# Altium PCB PCB1.PcbDoc
Units mm, origin at the board's own origin, x right, y up, seen from the top; angles counter-clockwise.
Board outline 69.11 x 35.61 mm, 2 copper layers (Top Layer, Bottom Layer); 32 components, 26 nets, 136 pads, 14 vias.
Unrouted connection lines stored in the file: 1.
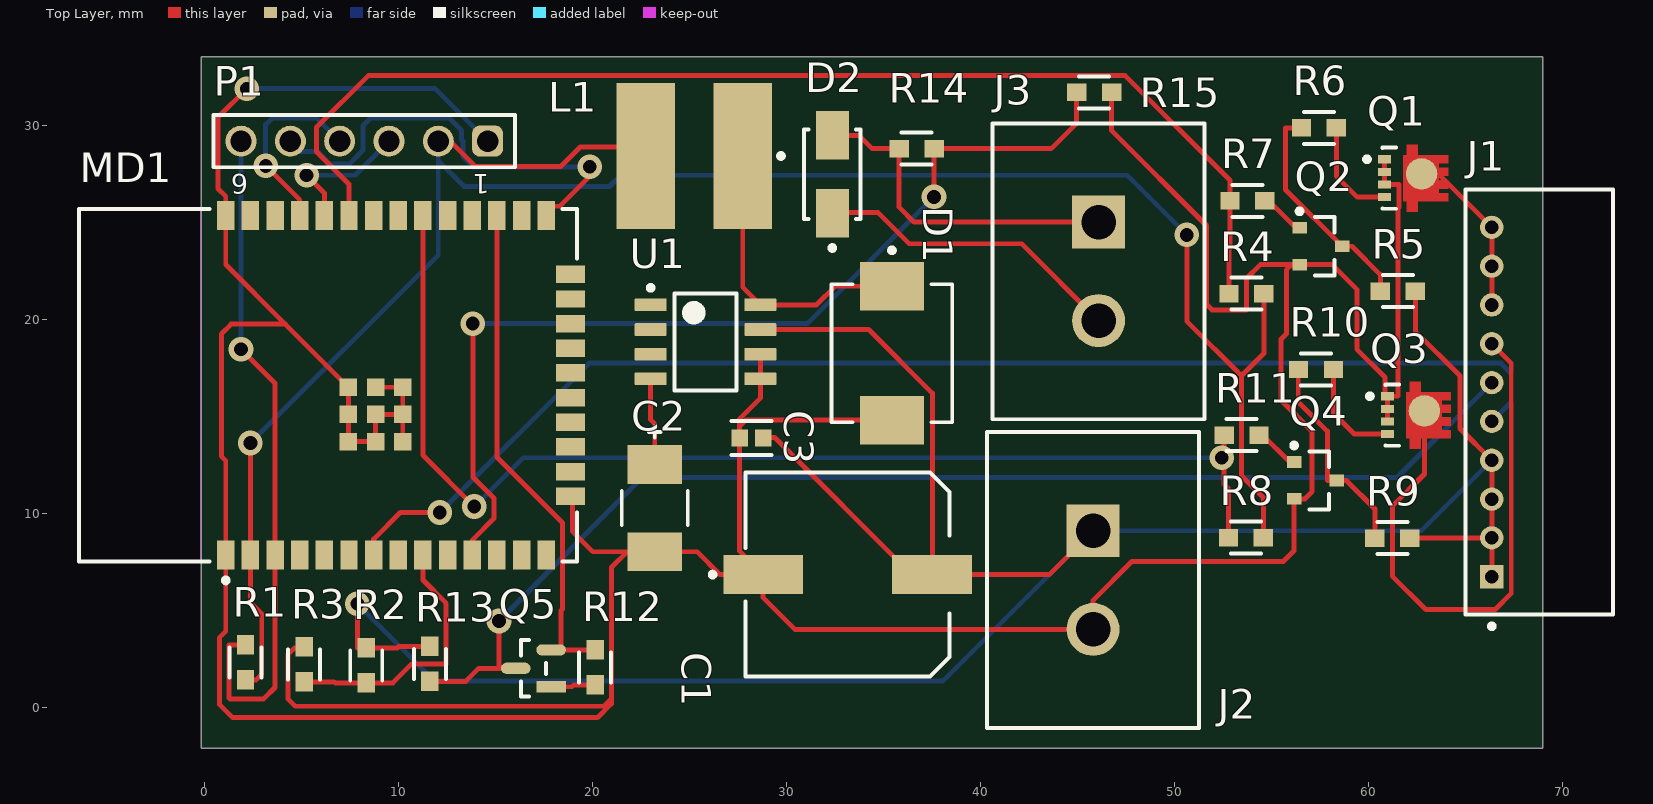
[diagram p0: Top Layer view]
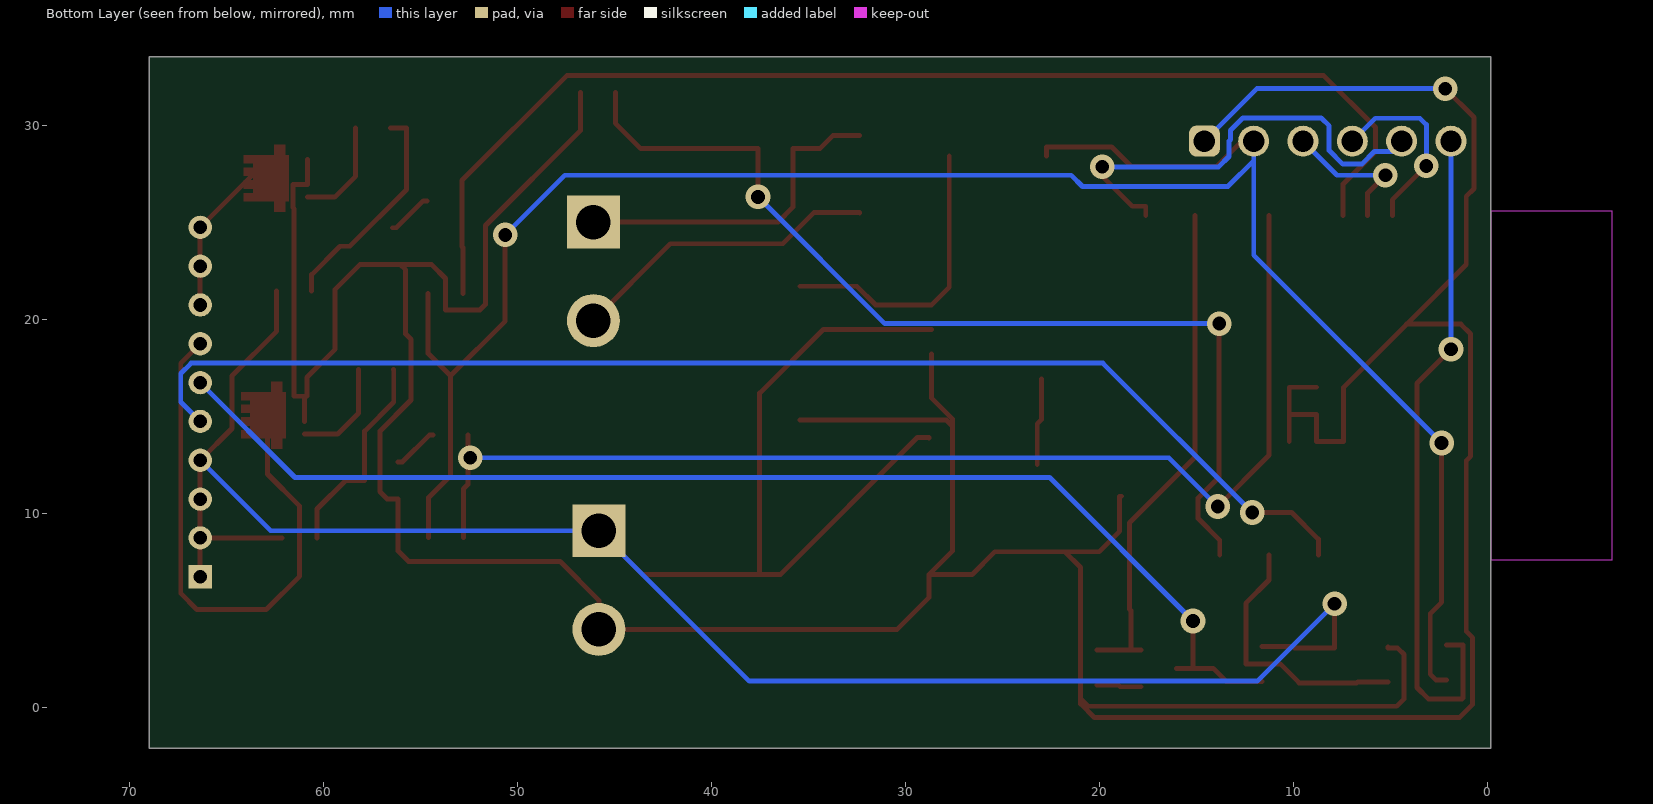
[diagram p1: Bottom Layer view, seen from below]
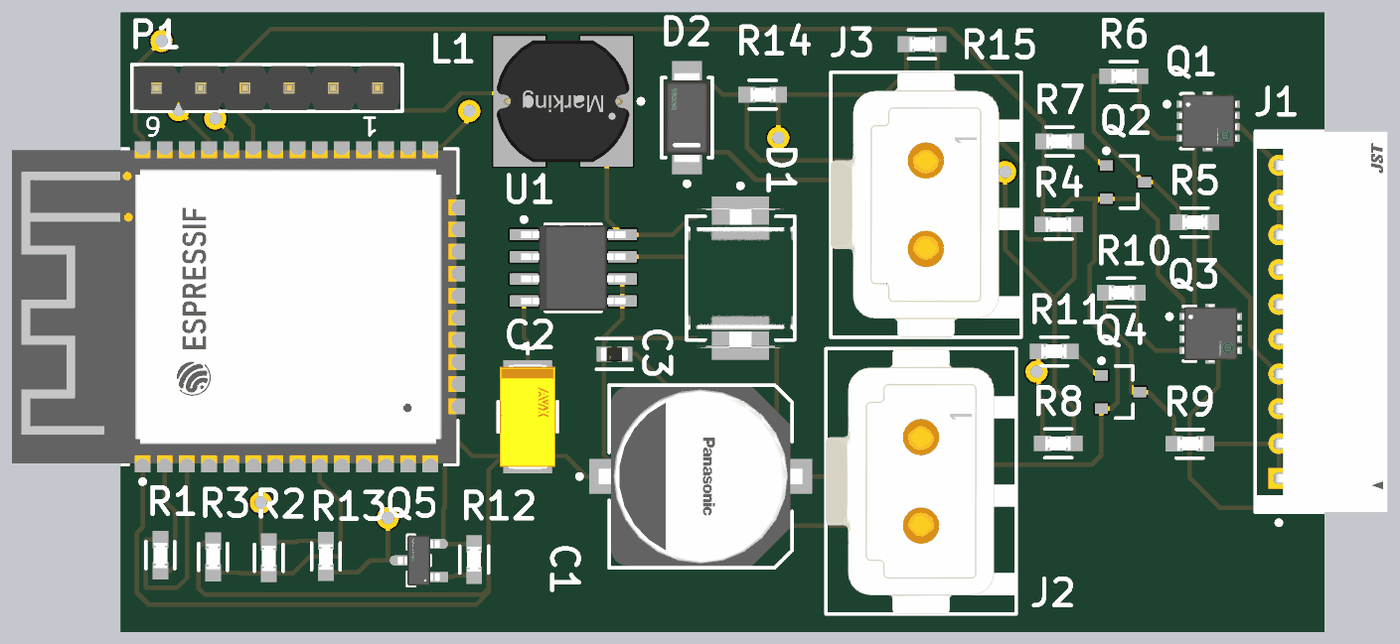
[diagram p2: 3D render of the assembled board from above, using the file's embedded part models]

## Layer stack, top to bottom
Top Solder: solder mask 0.0102, Solder Resist, Dk 3.5
Top Layer: signal copper 0.0356
Dielectric 1: dielectric 0.32, FR-4, Dk 4.8
Bottom Layer: signal copper 0.0356
Bottom Solder: solder mask 0.0102, Solder Resist, Dk 3.5

## Board outline
-0.152,-2.083 -0.152,33.528 68.961,33.528 68.961,-2.083

## Design rules (kind name [scope] priority, off if disabled: settings)
Clearance [All] p1: gap=0.254 ignorepadtopadclearanceinfootprint=FALSE
PolygonConnect [All] p1: connectstyle=Relief reliefconductorwidth=0.254 reliefentries=4 polygonreliefangle="90 Angle" airgapwidth=0.254
RoutingVias [All] p1: holewidth=0.711 width=1.27 viastyle="Through Hole" minholewidth=0.711 minwidth=1.27 maxholewidth=0.711 maxwidth=1.27
SolderMaskExpansion [All] p1: expansion=0.102 istentingtop=FALSE
Width [All] p1: maxlimit=0.254 minlimit=0.254 preferedwidth=0.254
30 further rules are at their usual default settings.

## Classes and differential pairs
component class CONNECTORS: D2 J1 J2 J3 P1 R14 R15
component class "COMM LEVEL SHIFTER": Q5 R12 R13
component class POWER: C1 C2 C3 D1 L1 Q2 Q3 Q4 Q5 R6 R7 R8 R9 R10 R11 R12 R13 U1
component class MCU: MD1 R1 R2 R3

## Components (designator, comment, footprint, x,y, rotation, side; value= is the part's Value field where it differs from the comment)
C1 "470uF/35V" FP-FKSG-MFG 33.145,6.86 r0 top
C2 "100uF/16V" FP-TAJC-MFG 23.216,10.287 r90 top
C3 "1uF" FP-0603-L_1_6_0_15-W_0_8-IPC_C 28.194,13.894 r180 top
D1 "SK33-TP" FP-SMC-MFG 35.433,18.263 r270 top
D2 "ES2DA-13-F" FP-SMA-MFG 32.36,27.483 r90 top value=25pF
J1 "S10B-PH-K-S(LF)(SN)" FP-S10B-PH-K-S_LF_SN-MFG 68.783,15.748 r270 top
J2 "350539-1" FP-350539-1-MFG 45.796,6.579 r90 top
J3 "350539-1" FP-350539-1-MFG 46.076,22.479 r90 top
L1 "220uH/510mA" WE-PD2_7850 25.248,28.423 r180 top
MD1 "ESP32-WROOM-32E(M113EH3200PH3Q0)" FP-ESP32-WROOM-32E_M113EH-MFG 6.376,16.61 r90 top
P1 "61300611121" 61300611121 8.255,29.185 r180 top
Q1 "G30N03D3" FP-511AB-MFG 62.281,27.28 r270 top
Q2 "SMBT3904" INF-SOT23_L 57.531,23.774 r0 top
Q3 "G30N03D3" FP-511AB-MFG 62.43,15.072 r270 top
Q4 "SMBT3904" INF-SOT23_L 57.252,11.709 r0 top
Q5 "BSS138" FP-318-08-IPC_B 16.967,2.032 r180 top
R1 "10k" FP-RP731J-MFG 2.134,2.337 r90 top value=10kΩ
R2 "91k" FP-RP731J-MFG 8.357,2.184 r90 top value=91kΩ
R3 "12k" FP-RP731J-MFG 5.156,2.235 r270 top value=12kΩ
R4 "1k" FP-RP731J-MFG 53.696,21.336 r0 top value=1kΩ
R5 "10k" FP-RP731J-MFG 61.493,21.463 r180 top value=10kΩ
R6 "1R" FP-RP731J-MFG 57.429,29.87 r180 top value=1Ω
R7 "1k" FP-RP731J-MFG 53.746,26.111 r0 top value=1kΩ
R8 "1k" FP-RP731J-MFG 53.67,8.763 r0 top value=1kΩ
R9 "10k" FP-RP731J-MFG 61.214,8.738 r180 top value=10kΩ
R10 "1R" FP-RP731J-MFG 57.277,17.424 r180 top value=1Ω
R11 "1k" FP-RP731J-MFG 53.442,14.046 r0 top value=1kΩ
R12 "10k" FP-RP731J-MFG 20.142,2.083 r270 top value=10kΩ
R13 "10k (N.C.)" FP-RP731J-MFG 11.633,2.261 r90 top value=10kΩ
R14 "91k" FP-RP731J-MFG 36.703,28.804 r180 top value=91kΩ
R15 "12k" FP-RP731J-MFG 45.847,31.699 r180 top value=12kΩ
U1 "LM2594M-3.3" D0008A_M 25.83,18.848 r0 top

## Footprints (in the part's own frame and the unit in brackets; to place one, negate y for a bottom-side part, rotate by r counter-clockwise, add the part's x,y. Pads: shape width x height; smd on the part's side, far side on the other; paste and mask are expansions set on the pad)
61300611121 [mm] "Pin Header, pitch 2.54 mm, THT, Vertical, single row, 6p"
  rrect50% 1.6x1.6 hole 1.1: 1(-6.35,0)
  round 1.6 hole 1.1: 2(-3.81,0) 3(-1.27,0) 4(1.27,0) 5(3.81,0) 6(6.35,0)
  silkscreen extent -7.77,-1.34 7.77,1.34, body extent -7.62,-1.27 7.62,1.27, height 8.57
D0008A_M [mm] "SOIC, 8-Leads, Body 5x4mm, Pitch 1.27mm, IPC Low Density"
  rrect15% 1.65x0.65 smd: 1(-2.825,1.905) 2(-2.825,0.635) 3(-2.825,-0.635) 4(-2.825,-1.905) 5(2.825,-1.905) 6(2.825,-0.635) 7(2.825,0.635) 8(2.825,1.905)
  silkscreen extent -2.95,-2.5 1.6,2.9, body extent -3,-2.45 3,2.45, height 1.63
FP-318-08-IPC_B [mm]
  rect 1.524x0.578 smd paste+0 mask+0: 1(-0.91,0.95)
  rrect100% 1.524x0.578 smd paste+0 mask+0: 2(-0.91,-0.95) 3(0.91,0)
  silkscreen extent -0.65,-1.45 0.65,1.45, body extent -1.92,-1.7 1.92,1.7, height 0.25
FP-511AB-MFG [mm]
  rect 0.42x0.66 smd paste+0 mask+0: 1(-0.975,-1.47) 2(-0.325,-1.47) 3(0.325,-1.47) 4(0.975,-1.47)
  round 1.623 smd paste+0 mask+0: 5-6-7-8(-0.221,0.434)
  Top Layer region: -1.73,-0.32 -1.185,-0.32 -1.185,-0.5 1.185,-0.5 1.185,-0.32 1.73,-0.32 1.73,0.25 1.185,0.25 1.185,1.8 0.765,1.8 0.765,1.33 0.535,1.33 0.535,1.8 0.115,1.8 0.115,1.33 -0.115,1.33 -0.115,1.8 -0.535,1.8 -0.535,1.33 -0.765,1.33 -0.765,1.8 -1.185,1.8 -1.185,0.25 -1.73,0.25 -1.73,-0.32
  silkscreen extent -1.58,-2.5 1.58,-0.87, body extent -1.83,-1.9 1.83,1.9, height 0.25
FP-0603-L_1_6_0_15-W_0_8-IPC_C [mm]
  rect 0.858x0.862 smd paste+0 mask+0: 1(-0.602,0) 2(0.602,0)
  silkscreen extent -1.03,-0.88 1.03,0.87, body extent -1.13,-0.58 1.13,0.58, height 0.25
FP-350539-1-MFG [mil]
  rect 107.4x107.4 hole 70 paste-99999 mask+0: 1(100,0)
  round 107.4 hole 70 paste-99999 mask+0: 2(-100,0)
  silkscreen extent -300,-215 300,215, body extent -304,-219 304,219, height 10
FP-ESP32-WROOM-32E_M113EH-MFG [mm]
  rect 1.5x0.9 smd paste+0 mask+0: 1(-8.75,5.26) 2(-8.75,3.99) 3(-8.75,2.72) 4(-8.75,1.45) 5(-8.75,0.18) 6(-8.75,-1.09) 7(-8.75,-2.36) 8(-8.75,-3.63) 9(-8.75,-4.9) 10(-8.75,-6.17) 11(-8.75,-7.44) 12(-8.75,-8.71) 13(-8.75,-9.98) 14(-8.75,-11.25) 25(8.75,-11.25) 26(8.75,-9.98) 27(8.75,-8.71) 28(8.75,-7.44) 29(8.75,-6.17) 30(8.75,-4.9) 31(8.75,-3.63) 32(8.75,-2.36) 33(8.75,-1.09) 34(8.75,0.18) 35(8.75,1.45) 36(8.75,2.72) 37(8.75,3.99) 38(8.75,5.26)
  rect 0.9x1.5 smd paste+0 mask+0: 15(-5.715,-12.5) 16(-4.445,-12.5) 17(-3.175,-12.5) 18(-1.905,-12.5) 19(-0.635,-12.5) 20(0.635,-12.5) 21(1.905,-12.5) 22(3.175,-12.5) 23(4.445,-12.5) 24(5.715,-12.5)
  rect 0.9x0.9 smd paste+0 mask+0: 39(-2.9,-2.46) 39(-2.9,-1.06) 39(-2.9,-3.86) 39(-1.5,-1.06) 39(-1.5,-3.86) 39(-1.5,-2.46) 39(-0.1,-1.06) 39(-0.1,-2.46) 39(-0.1,-3.86)
  Keep-Out Layer region: -9,6.559 9,6.559 9,12.75 -9,12.75
  silkscreen extent -10.17,-12.82 9.07,12.83, body extent -9.6,-13.35 9.6,12.93, height 0.25
FP-FKSG-MFG [mm]
  rect 4.1x2 smd paste+0 mask+0: 1(-4.35,0) 2(4.35,0)
  silkscreen extent -7.07,-5.25 5.25,5.25, body extent -6.65,-5.5 6.65,5.5, height 0.25
FP-RP731J-MFG [mm]
  rect 1x0.9 smd paste+0 mask+0: 1(-0.9,0) 2(0.9,0)
  silkscreen extent -0.78,-0.82 0.78,0.82, body extent -1.5,-0.55 1.5,0.55, height 0.25
FP-S10B-PH-K-S_LF_SN-MFG [mm]
  rect 1.2x1.2 hole 0.7 paste-2539.97 mask+0: 1(9,-2.45)
  round 1.2 hole 0.7 paste-2539.97 mask+0: 2(7,-2.45) 3(5,-2.45) 4(3,-2.45) 5(1,-2.45) 6(-1,-2.45) 7(-3,-2.45) 8(-5,-2.45) 9(-7,-2.45) 10(-9,-2.45)
  silkscreen extent -10.95,-3.8 11.67,3.8, body extent -11.05,-3.9 11.05,3.9, height 0.25
FP-SMA-MFG [mm]
  rect 2.5x1.7 smd paste+0 mask+0: 1(-2,0) 2(2,0)
  silkscreen extent -3.92,-1.46 2.3,1.46, body extent -3.35,-1.56 3.35,1.56, height 0.25
FP-SMC-MFG [mm]
  rect 2.5x3.3 smd paste+0 mask+0: 1(-3.45,0) 2(3.45,0)
  silkscreen extent -5.42,-3.11 3.55,3.11, body extent -4.8,-3.21 4.8,3.21, height 0.25
FP-TAJC-MFG [mm]
  rect 2x2.8 smd paste+0 mask+0: 1(-2.25,0) 2(2.25,0)
  silkscreen extent -0.87,-1.7 4.23,1.7, body extent -3.35,-1.8 3.35,1.8, height 0.25
INF-SOT23_L [mm] "SOT23, 3-Leads, Body 2.9x1.3 mm, Pitch 0.95 mm, IPC High Density"
  rect 0.75x0.6 smd: 1(-1.1,0.95) 2(-1.1,-0.95) 3(1.1,0)
  silkscreen extent -1.22,-1.5 0.7,1.92, body extent -0.7,-1.5 0.7,1.5, height 1.1
WE-PD2_7850 [mm] "SMD Power Inductor, 2-Leads, body 7.8x7mm"
  rect 3x7.5 smd: 1(-2.5,0) 2(2.5,0)
  silkscreen extent -4.59,-0.12 -4.34,0.12, body extent -3.81,-3.5 3.81,3.5, height 4.95

## Part data
C1: library part CMP-05427-000037-1, "CAP ALUM 470UF 20% 35V SMD", Capacitance=470uF, Case/Package=Radial, ESR (Equivalent Series Resistance)=80mR, LCSC Part #=C280413, Max Operating Temperature=105°C, Min Operating Temperature=-55°C, Package Quantity=500, Ripple Current=552.5mA, Ripple Current (AC)=850mA, Tolerance=20%, Voltage Rating=35V, Diameter=10mm, Height=10.2mm, Height - Seated (Max)=0.413inch, Life (Hours)=2000Hour, Mount="Surface Mount", packaging="Cut Tape", Polarity=Polar, RoHS Compliant=Yes, Voltage Rating (DC)=35V
C2: library part CMP-2100-03691-2, "100uF 16V  ±10% 1Ω 2312  SMD Tantalum Capacitor", Capacitance=100uF, Case Code (Metric)=6032, Case Code (Imperial)=2412, Case/Package=Molded, ESR (Equivalent Series Resistance)=1R, LCSC Part #=C122646, Leakage Current=16uA, Max Operating Temperature=125°C, Min Operating Temperature=-55°C, Package Quantity=1, Tolerance=10%, Voltage Rating=16V, Construction=Flat, Depth=3.2mm, Dissipation Factor=8%, Features="General Purpose", Height=2.8mm, Height - Seated (Max)=0.11inch, Lead Free="Lead Free", Length=6mm, Mount="Surface Mount", Number of Pins=2, packaging="Tape and Reel", Polarity=Polar, Radiation Hardening=No, REACH SVHC="No SVHC", RoHS Compliant=Yes, Series=TAJ, Termination=SMD/SMT, Voltage Rating (DC)=16V, Width=3.2mm
C3: library part CMP-2000-07531-4, "Ceramic Capacitor General Use 1uF ±10% 50V X7R 0603", Case Code (Metric)=1608, Case Code (Imperial)=0603, Dielectric=X7R, LCSC Part #=C478859, Max Operating Temperature=125°C, Min Operating Temperature=-55°C, Package Quantity=1, Tolerance=10%, Voltage Rating=50V, Capacitance=1uF, Case/Package=0603, Construction=Flat, Depth=0.8mm, Halogen Free="Halogen Free", Height=0.8mm, Length=1.6mm, Mount="Surface Mount", packaging="Tape and Reel", Radiation Hardening=No, RoHS Compliant=Yes, Series=M, Termination=SMD/SMT, Thickness=0.037inch, Voltage Rating (DC)=50V, Width=0.031inch
D1: library part CMP-56206-000007-1, "DIODE SCHOTTKY 30V 3A DO214AB", Average Rectified Current=3A, Capacitance=250pF, Case/Package=SMC, Forward Voltage=500mV, LCSC Part #=C151786, Max Forward Surge Current (Ifsm)=100A, Max Operating Temperature=150°C, Max Repetitive Reverse Voltage (Vrrm)=30V, Max Reverse Leakage Current=500uA, Min Operating Temperature=-55°C, Package Quantity=1, Current Rating=3A, Element Configuration=Single, Forward Current=3A, Height=2.417mm, Lead Free="Lead Free", Length=7.11mm, Max Reverse Voltage (DC)=30V, Max Surge Current=100A, Mount="Surface Mount", Number of Pins=2, Output Current=3A, packaging="Tape and Reel", Peak Non-Repetitive Surge Current=100A, Peak Reverse Current=500uA, Polarity=Standard, Radiation Hardening=No, Voltage Rating (DC)=30V, Width=6.22mm
D2: library part CMP-12791-000014-1, "DIODE GEN PURP 200V 2A SMA", Capacitance=25pF, Forward Current=2A, LCSC Part #=C5140013, Manufacturer="Diodes Inc.", Max Junction Temp=+150°C, Max Repetitive Reverse Voltage=200V, Max Surge Forward Current=50A, Package=SMA, Peak Reverse Current=5uA, Temperature="-55°C to +150°C", Temperature Range Low=-55°C, Automotive=No, Category=Diode, ComponentLink2Description=Datasheet, ComponentLink2URL=https://www.diodes.com/assets/Datasheets/ds14002.pdf, Device Class L1="Discrete Semiconductors", Device Class L2=Diodes, Device Class L3="Rectifier Diodes", Digikey Description="DIODE GEN PURP 200V 2A SMA", Footprint Url=https://www.diodes.com/assets/Package-Files/SMA.pdf, Height=2.4mm, Lead Free=Yes, Manufacturer Part Number=ES2DA-13-F, Mouser Description="Rectifiers RECTIFIER SUPER FAST \"F\" LEAD FREE", Octopart=https://octopart.com/es2da-13-f-diodes+inc.-328903, Reverse Voltage=200V, RoHS=TRUE, Standoff Height=0.05mm, Temperature Range High=+150°C
J1: library part CMP-17439-000377-2, "CONN HEADER R/A 10POS 2MM", Color=Natural, Contact Resistance=20mR, Current Rating=2A, Flammability Rating="UL94 V-0", Housing Color=White, Max Operating Temperature=85°C, Max Voltage Rating (AC)=100V, Min Operating Temperature=-25°C, Connector Type=Header, Contact Finish - Mating=TIN, Contact Material=Brass, Contact Mating Length=0.13inch, Contact Plating=Copper, Contact Shape=Square, Contact Type="Male Pin", Depth=7.6mm, Fastening Type=Detent, Gender=Male, Height=9.4mm, Housing Material=Polyamide, Lead Free="Lead Free", Length=21.9mm, Max Current Rating=2A, Mount="Through Hole", Number of Contacts=10, Number of Pins=10, Number of Positions=10, Number of Rows=1, Orientation="Right Angle", packaging=Bulk, Pitch=2mm, Series=PH, Termination=Solder, Voltage Rating=100V, Width=4.5mm, Insulation Color=Natural, Insulation Material=Nylon
J2 J3: library part CMP-03369-000078-1, "CONN HEADER VERT 2POS 5.08MM", Current Rating=12A, Manufacturer="TE Connectivity", Temperature="-55°C to +105°C", Temperature Range High=+105°C, Temperature Range Low=-55°C, Voltage Rating=250V, Automotive=No, Category=Conn, ComponentLink2Description=Datasheet, ComponentLink2URL=https://www.te.com/usa-en/product-350539-1.html?te_bu=Cor&te_type=other&te_campaign=oct_glo_cor-oct-global-oth-prtnr-fy19-oct-octo-buy-bom_sma-298_2&elqCampaignId=35216, Conn Gender=Male, Conn Orientation=Vertical, Contact Material=Gold,Nickel, Device Class L1=Connectors, Device Class L2="Headers and Wire Housings", Device Class L3=unset, Digikey Description="CONN HEADER VERT 2POS 5.08MM", Height=0.41inch, Lead Free=Yes, Manufacturer Part Number=350539-1, Mouser Description="Pin & Socket Connectors CONN PCM 2 POS TIN", Number of Contacts=2, Number of Rows=1, Octopart=https://octopart.com/350539-1-te+connectivity-46510628, Package=350539-1, Pitch=5.08mm, RoHS=TRUE, Standoff Height=0.025inch
L1: library part CMP-0227-00452-2, Ambient Temperature Range High=85°C, Ambient Temperature Range Low=-40°C, Current Rating=510mA, DC Resistance (DCR)=614mΩ, LCSC Part #=C2929444, Max Operating Temperature=125°C, Self Resonant Frequency=5MHz, Inductance=220µH, Inductance Tolerance=10%, Height=5mm, Length=7mm, Min Operating Temperature=-40°C, NexarPartId=22803417, Number of Pins=2, packaging=Bulk, Resistance=614mΩ, RoHS=Compliant, Width=7.8mm
MD1: library part CMP-194065-000012-1, "RX TXRX MOD WIFI TRACE ANT SMD", LCSC Part #=C701341
P1: library part CMP-1502-01070-2, Color=Black, Contact Resistance=20mΩ, Current Rating=3A, Max Operating Temperature=105°C, Min Operating Temperature=-40°C, Operating Supply Voltage=250V, Connector Type="Male Pin", Contact Gender=Male, Contact Material=Copper, Contact Mating Length=5.9944mm, Contact Plating=Gold, Gender=Male, Height=8.89mm, Housing Material=PBT, Lead Free="Lead Free", Lead Pitch=2.54mm, Mount="Through Hole", NexarPartId=20084590, Number of Contacts=6, Number of Pins=6, Number of Positions=6, Number of Rows=1, Orientation=Vertical, packaging=Bulk, Pitch=2.54mm, REACH SVHC=Unknown, RoHS=Compliant, Termination="Through Hole", Voltage Rating=250V
Q1 Q3: library part CMP-00278-71475164-1, "C840054", Continuous Drain Current (ID)=20A, Drain to Source Breakdown Voltage=40V, Drain to Source Resistance=4.8mΩ, Gate to Source Voltage (Vgs)=20V, Manufacturer Lifecycle Status=ACTIVE, Max Junction Temperature (Tj)=175°C, Max Power Dissipation=3.2W, Min Operating Temperature=-55°C, Threshold Voltage=2V, Input Capacitance=1.6nF, Drain to Source Voltage (Vdss)=40V, Height=800µm, LCSC Part #=C840054, Lead Free="Lead Free", Lifecycle Status=Production, Max Operating Temperature=175°C, Mount="Surface Mount", NexarPartId=71475164, Number of Channels=1, Number of Pins=8, Power Dissipation=3.2W, Rds On Max=3.8mΩ, REACH SVHC="No SVHC", RoHS=Compliant, Schedule B=8541290080, Turn-Off Delay Time=17ns, Turn-On Delay Time=9.3ns
Q2 Q4: library part CMP-1178-00005-1, "NPN Silicon Switching Transistor, 40 V VCEO, 200 mA IC, SOT23, Reel, Green", Manufacturer=Infineon, ComponentLink1Description="Manufacturer URL", ComponentLink1URL=http://www.infineon.com/, ComponentLink2Description=Datasheet, ComponentLink2URL=http://www.infineon.com/dgdl/smbt3904series_mmbt3904.pdf?folderId=db3a30431441fb5d011445fab851018e&fileId=db3a30431441fb5d0114460005c10191, ComponentLink3Description="Package Specification", ComponentLink3URL=http://www.infineon.com/dgdl/SOT23-Package_Overview.pdf?folderId=db3a30431936bc4b0119532290053c66&fileId=db3a30431936bc4b0119533468123c85, Green=TRUE, Mounting Technology="Surface Mount", PackageDescription="3-Pin Small Outline Transistor Package, 1.3 x 2.9 mm Body, 0.95 mm Pitch", PackageReference=SOT23, PackageVersion=Apr-08, Packing=Reel, PartNumber=SMBT3904, Polarity=NPN, VCBO (max)="60 V", VCE="1 V", VCE (max)="1 V", VCEO (max)="40 V", VEBO (max)="6 V", IC="10 mA", IC (max)="200 mA", ICBO (max)="50 nA"
Q5: library part CMP-07173-000101-1, "MOSFET N-CH 50V 220MA SOT-23", Case/Package=SOT-23, Continuous Drain Current (ID)=220mA, Drain to Source Breakdown Voltage=50V, Drain to Source Resistance=3.5R, Gate to Source Voltage (Vgs)=20V, LCSC Part #=C5224260, Max Operating Temperature=150°C, Max Power Dissipation=360mW, Min Operating Temperature=-55°C, On-State Resistance=6R, Package Quantity=1, Threshold Voltage=1.3V, Input Capacitance=27pF, Contact Plating=Tin, Current Rating=220mA, Drain to Source Voltage (Vdss)=50V, Dual Supply Voltage=50V, Element Configuration=Single, Fall Time=9ns, Height=0.93mm, Lead Free="Lead Free", Length=2.92mm, Mount="Surface Mount", Nominal Vgs=1.3V, Number of Elements=1, Number of Pins=3, packaging="Tape and Reel", Power Dissipation=360mW, Radiation Hardening=No, Rds On Max=3.5R, REACH SVHC="No SVHC", Rise Time=9ns, Termination=SMD/SMT, Turn-Off Delay Time=20ns, Turn-On Delay Time=2.5ns, Voltage Rating (DC)=50V, Weight=0.03g, Width=1.3mm
R1: library part CMP-03211-008596-1, "TE CONNECTIVITY / HOLSWORTHY SMD Chip Resistor, Thin Film, 8.45Ω, 50 V, 0603 [1608 Metric], 100 mW, 0.1% , RP73 Series", Case/Package=603, Manufacturer="TE Connectivity", Manufacturer Part Number=RP73D1J8R45BTDG, Package=RP731J, Power Rating=0.1W, Resistance=10kΩ, Temperature="-55°C to +105°C", Temperature Coefficient=15ppm/°C, Temperature Range High=+105°C, Temperature Range Low=-55°C, Tolerance=0.1%, Voltage Rating=75V, Automotive=No, Category=Res, ComponentLink2Description=Datasheet, ComponentLink2URL=https://www.te.com/commerce/DocumentDelivery/DDEController?Action=srchrtrv&DocNm=1773272&DocType=DS&DocLang=English, Composition="Thin Film", Device Class L1="Passive Components", Device Class L2=Resistors, Device Class L3="Chip SMD Resistors", Height=0.55mm, Lead Free=Yes, Octopart=https://octopart.com/rp73d1j8r45btdg-te+connectivity-42630912, octopart_url=https://octopart.com/rp73d1j8r45btdg-te+connectivity-42630912, packaging="cut tape", RoHS=TRUE, Series=RP73, Ipc Land Pattern Name=RESC15580X45
R2 R14: library part CMP-03211-008596-1, "TE CONNECTIVITY / HOLSWORTHY SMD Chip Resistor, Thin Film, 8.45Ω, 50 V, 0603 [1608 Metric], 100 mW, 0.1% , RP73 Series", Case/Package=603, Manufacturer="TE Connectivity", Manufacturer Part Number=RP73D1J8R45BTDG, Power Rating=0.1W, Resistance=91kΩ, Temperature="-55°C to +105°C", Temperature Coefficient=15ppm/°C, Temperature Range High=+105°C, Temperature Range Low=-55°C, Tolerance=0.1%, Voltage Rating=75V, Automotive=No, Category=Res, ComponentLink2Description=Datasheet, ComponentLink2URL=https://www.te.com/commerce/DocumentDelivery/DDEController?Action=srchrtrv&DocNm=1773272&DocType=DS&DocLang=English, Composition="Thin Film", Device Class L1="Passive Components", Device Class L2=Resistors, Device Class L3="Chip SMD Resistors", Height=0.55mm, Lead Free=Yes, Octopart=https://octopart.com/rp73d1j8r45btdg-te+connectivity-42630912, octopart_url=https://octopart.com/rp73d1j8r45btdg-te+connectivity-42630912, Package=603, packaging="cut tape", RoHS=TRUE, Series=RP73, Ipc Land Pattern Name=RESC15580X45
R3 R15: library part CMP-03211-008596-1, "TE CONNECTIVITY / HOLSWORTHY SMD Chip Resistor, Thin Film, 8.45Ω, 50 V, 0603 [1608 Metric], 100 mW, 0.1% , RP73 Series", Case/Package=603, Manufacturer="TE Connectivity", Manufacturer Part Number=RP73D1J8R45BTDG, Power Rating=0.1W, Resistance=12kΩ, Temperature="-55°C to +105°C", Temperature Coefficient=15ppm/°C, Temperature Range High=+105°C, Temperature Range Low=-55°C, Tolerance=0.1%, Voltage Rating=75V, Automotive=No, Category=Res, ComponentLink2Description=Datasheet, ComponentLink2URL=https://www.te.com/commerce/DocumentDelivery/DDEController?Action=srchrtrv&DocNm=1773272&DocType=DS&DocLang=English, Composition="Thin Film", Device Class L1="Passive Components", Device Class L2=Resistors, Device Class L3="Chip SMD Resistors", Height=0.55mm, Lead Free=Yes, Octopart=https://octopart.com/rp73d1j8r45btdg-te+connectivity-42630912, octopart_url=https://octopart.com/rp73d1j8r45btdg-te+connectivity-42630912, Package=603, packaging="cut tape", RoHS=TRUE, Series=RP73, Ipc Land Pattern Name=RESC15580X45
R4 R7 R8 R11: library part CMP-03211-008596-1, Case/Package=603, Manufacturer="TE Connectivity", Manufacturer Part Number=RP73D1J8R45BTDG, Power Rating=0.1W, Resistance=1kΩ, Temperature="-55°C to +105°C", Temperature Coefficient=15ppm/°C, Temperature Range High=+105°C, Temperature Range Low=-55°C, Tolerance=0.1%, Voltage Rating=75V, Automotive=No, Category=Res, ComponentLink2Description=Datasheet, ComponentLink2URL=https://www.te.com/commerce/DocumentDelivery/DDEController?Action=srchrtrv&DocNm=1773272&DocType=DS&DocLang=English, Composition="Thin Film", Device Class L1="Passive Components", Device Class L2=Resistors, Device Class L3="Chip SMD Resistors", Height=0.55mm, Lead Free=Yes, Octopart=https://octopart.com/rp73d1j8r45btdg-te+connectivity-42630912, octopart_url=https://octopart.com/rp73d1j8r45btdg-te+connectivity-42630912, Package=603, packaging="cut tape", RoHS=TRUE, Series=RP73, Ipc Land Pattern Name=RESC15580X45
R5 R9: library part CMP-03211-008596-1, Case/Package=603, Manufacturer="TE Connectivity", Manufacturer Part Number=RP73D1J8R45BTDG, Power Rating=0.1W, Resistance=10kΩ, Temperature="-55°C to +105°C", Temperature Coefficient=15ppm/°C, Temperature Range High=+105°C, Temperature Range Low=-55°C, Tolerance=0.1%, Voltage Rating=75V, Automotive=No, Category=Res, ComponentLink2Description=Datasheet, ComponentLink2URL=https://www.te.com/commerce/DocumentDelivery/DDEController?Action=srchrtrv&DocNm=1773272&DocType=DS&DocLang=English, Composition="Thin Film", Device Class L1="Passive Components", Device Class L2=Resistors, Device Class L3="Chip SMD Resistors", Height=0.55mm, Lead Free=Yes, Octopart=https://octopart.com/rp73d1j8r45btdg-te+connectivity-42630912, octopart_url=https://octopart.com/rp73d1j8r45btdg-te+connectivity-42630912, Package=603, packaging="cut tape", RoHS=TRUE, Series=RP73, Ipc Land Pattern Name=RESC15580X45
R6 R10: library part CMP-03211-008596-1, Case/Package=603, Manufacturer="TE Connectivity", Manufacturer Part Number=RP73D1J8R45BTDG, Power Rating=0.1W, Resistance=1Ω, Temperature="-55°C to +105°C", Temperature Coefficient=15ppm/°C, Temperature Range High=+105°C, Temperature Range Low=-55°C, Tolerance=0.1%, Voltage Rating=75V, Automotive=No, Category=Res, ComponentLink2Description=Datasheet, ComponentLink2URL=https://www.te.com/commerce/DocumentDelivery/DDEController?Action=srchrtrv&DocNm=1773272&DocType=DS&DocLang=English, Composition="Thin Film", Device Class L1="Passive Components", Device Class L2=Resistors, Device Class L3="Chip SMD Resistors", Height=0.55mm, Lead Free=Yes, Octopart=https://octopart.com/rp73d1j8r45btdg-te+connectivity-42630912, octopart_url=https://octopart.com/rp73d1j8r45btdg-te+connectivity-42630912, Package=603, packaging="cut tape", RoHS=TRUE, Series=RP73, Ipc Land Pattern Name=RESC15580X45
R12 R13: library part CMP-03211-008596-1, "TE CONNECTIVITY / HOLSWORTHY SMD Chip Resistor, Thin Film, 8.45Ω, 50 V, 0603 [1608 Metric], 100 mW, 0.1% , RP73 Series", Case/Package=603, Manufacturer="TE Connectivity", Manufacturer Part Number=RP73D1J8R45BTDG, Power Rating=0.1W, Resistance=10kΩ, Temperature="-55°C to +105°C", Temperature Coefficient=15ppm/°C, Temperature Range High=+105°C, Temperature Range Low=-55°C, Tolerance=0.1%, Voltage Rating=75V, Automotive=No, Category=Res, ComponentLink2Description=Datasheet, ComponentLink2URL=https://www.te.com/commerce/DocumentDelivery/DDEController?Action=srchrtrv&DocNm=1773272&DocType=DS&DocLang=English, Composition="Thin Film", Device Class L1="Passive Components", Device Class L2=Resistors, Device Class L3="Chip SMD Resistors", Height=0.55mm, Lead Free=Yes, Octopart=https://octopart.com/rp73d1j8r45btdg-te+connectivity-42630912, octopart_url=https://octopart.com/rp73d1j8r45btdg-te+connectivity-42630912, Package=603, packaging="cut tape", RoHS=TRUE, Series=RP73, Ipc Land Pattern Name=RESC15580X45
U1: library part CMP-0069-00878-3, "SIMPLE SWITCHER® Power Converter 150 KHz 0.5A Step-Down Voltage Regulator, 8-pin Narrow SOIC", LCSC Part #=C3029048, Manufacturer="Texas Instruments", PackageTopMarking=NSZXTT*2594*M-3.3, PowerWise=N, Code_JEDEC=MS-012-AA, Code_IPC=SOIC127P600-8, ComponentLink1Description="Datasheet URL", ComponentLink1URL=http://www.ti.com/general/docs/lit/getliterature.tsp?genericPartNumber=LM2594&fileType=pdf, CompType=Switcher, PackageDescription="SOIC Narrow, 4.9 x 3.9 x 1.45mm, 8 Lead, 1.27mm Pitch", PackageReference=D0008A, PinCount=8, RoHS=N

## Via types
v1: diameter 1.27, hole 0.711, Top Layer to Bottom Layer, 14 vias

## Nets (pads, with @x,y where several pads share a name; then routed paths per layer and width w, separated by ;. In a path a pad name is that pad's centre, name@x,y a point inside that pad or via, vN(x,y) a via of type N, cw(c..) or ccw(c..) an arc to the next point about the centre after c; other vN are vias at no path point)
+3.3V: Q5.1 R12.2 | length 2.3
  Top Layer w0.254: Q5.1 18.948,1.082 19.049,1.183 R12.2
+3V3: C2.2 L1.2 MD1.2 P1.2 R1.1 R4.2 R8.2 U1.4 | length 111.8
  Top Layer w0.254: R1.1 2.681,1.437 2.972,1.727 2.972,4.85 2.386,5.436 MD1.2 v1(2.386,13.638) ; P1.2 12.675,29.185 13.97,27.889 18.39,27.889 19.383,28.883 22.748,28.883 L1.2 ; U1.4 23.005,14.841 23.216,14.63 C2.2 ; v1(50.622,24.359) 50.622,19.914 53.442,17.094 ; R8.2 54.57,10.82 53.442,11.949 53.442,17.094 ; R4.2 54.596,18.248 53.442,17.094
  Bottom Layer w0.254: v1(2.386,13.638) 12.065,23.317 12.065,28.178 ; P1.2 12.065,28.178 ; v1(50.622,24.359) 47.549,27.432 21.468,27.432 20.884,26.848 13.395,26.848 12.065,28.178
BATT_LVL: MD1.9 R2.1 R3.2 | length 13.8
  Top Layer w0.254: R3.2 6.706,1.335 6.756,1.284 R2.1 9.728,1.284 10.704,2.261 12.471,2.261 12.471,5.385 11.276,6.58 MD1.9
BOOT_MODE: MD1.25 P1.5 | length 23.6
  Top Layer w0.254: MD1.25 17.626,25.832 18.313,25.832 19.863,27.381 v1(19.863,27.864)
  Bottom Layer w0.254: P1.5 4.445,28.651 5.848,28.651 6.496,28.004 7.474,28.004 8.179,28.708 8.179,29.972 8.585,30.378 12.624,30.378 13.259,29.743 13.259,29.261 13.335,29.185 13.335,28.397 13.868,27.864 v1(19.863,27.864)
CHG_DET: MD1.11 R14.1 R15.2 | length 51.3
  Top Layer w0.254: MD1.11 13.816,8.635 14.935,9.754 14.935,10.795 13.843,11.887 v1(13.843,19.787) ; v1(37.603,26.318) R14.1 43.637,28.804 44.947,30.113 R15.2
  Bottom Layer w0.254: v1(13.843,19.787) 31.072,19.787 v1(37.603,26.318)
COMM_HI: J1.6 Q5.3 R13.1 | length 63.4
  Top Layer w0.254: R13.1 13.487,1.361 14.159,2.032 15.189,2.032 ; v1(15.189,4.47) 15.189,2.032 ; Q5.3 15.189,2.032
  Bottom Layer w0.254: v1(15.189,4.47) 22.581,11.862 61.447,11.862 J1.6
COMM_LO: MD1.27 Q5.2 R12.1 | length 26.1
  Top Layer w0.254: MD1.27 15.086,12.905 18.466,9.525 18.466,5.08 18.39,5.004 Q5.2@18.39,2.982 ; Q5.2 Q5.2@18.39,2.982 ; 18.999,2.982 Q5.2@18.39,2.982 ; 19,2.983 R12.1
GND: C1.1 C2.1 C3.2 D1.2 J2.2 MD1.1 MD1.15 MD1.38 MD1.39 P1.1 Q1.1 Q1.2 Q1.3 Q2.2 Q3.1 Q3.2 Q3.3 Q4.2 R3.1 R15.1 U1.5 U1.6 | length 240.9
  Top Layer w0.254: v1(2.197,31.89) 0.711,30.404 0.711,26.746 1.116,26.341 MD1.38 1.116,22.83 4.185,19.761 ; R3.1 5.156,3.073 4.648,3.073 4.318,2.743 4.318,0.457 4.699,0.076 20.599,0.076 20.98,0.457 ; MD1.39@8.836,16.51 10.236,16.51 MD1.39@10.236,15.11 ; MD1.39@10.236,13.71 MD1.39@10.236,15.11 ; MD1.15 18.974,10.895 18.974,9.093 20.03,8.037 21.793,8.037 ; U1.6 U1.5 28.655,15.948 27.592,14.884 27.592,14.515 ; D1.2 27.889,14.813 27.592,14.515 ; R15.1 46.736,31.699 46.736,29.743 51.638,24.841 51.638,20.777 51.918,20.498 53.696,20.498 53.696,22.113 54.407,22.824 56.022,22.824 ; Q1.1 Q1.2 Q1.3 61.544,26.955 61.544,25.756 61.493,25.705 61.493,16.047 Q3.1 ; Q3.3 Q3.2 Q3.1 ; 4.185,19.761 1.397,19.761 0.889,19.253 0.889,12.954 1.116,12.727 MD1.1 1.116,3.936 0.787,3.607 0.787,0.178 1.473,-0.508 20.269,-0.508 20.98,0.203 20.98,0.457 ; 4.185,19.761 7.436,16.51 7.436,15.11 7.436,13.71 8.836,13.71 8.836,15.11 MD1.39@10.236,15.11 ; 20.98,0.457 20.98,7.224 21.793,8.037 ; 21.793,8.037 C2.1 25.4,8.037 26.577,6.86 C1.1 ; 27.592,14.515 C3.2 27.592,8.063 C1.1 ; C1.1 28.795,5.672 30.429,4.039 J2.2 45.796,5.537 47.803,7.544 55.601,7.544 56.134,8.077 56.134,10.759 Q4.2 56.708,10.759 57.074,11.125 57.074,14.249 55.474,15.85 55.474,18.974 55.753,19.253 55.753,22.555 56.022,22.824 ; 56.022,22.824 Q2.2 58.115,22.824 59.385,21.554 59.385,18.466 60.833,17.018 60.833,16.047 Q3.1
  Bottom Layer w0.254: v1(2.197,31.89) 11.9,31.89 P1.1
KEY_IN: J1.5 MD1.7 | length 66.3
  Top Layer w0.254: MD1.7 8.736,8.685 10.109,10.058 v1(12.141,10.058)
  Bottom Layer w0.254: v1(12.141,10.058) 19.837,17.755 66.802,17.755 67.335,17.221 67.335,15.75 J1.5
NetD1_1: D1.1 L1.1 U1.8 | length 15.2
  Top Layer w0.254: L1.1 27.748,21.661 U1.8 31.547,20.753 32.506,21.713 D1.1
NetD2_1: D2.1 J3.2 | length 16
  Top Layer w0.254: D2.1 32.36,25.502 34.722,25.502 36.322,23.901 42.113,23.901 J3.2
NetD2_2: D2.2 J3.1 R14.2 | length 17.3
  Top Layer w0.254: D2.2 33.731,29.483 34.41,28.804 R14.2 35.803,25.781 36.565,25.019 J3.1
NetQ1_4: Q1.4 R6.1 | length 5.4
  Top Layer w0.254: R6.1 58.329,27.381 59.406,26.305 Q1.4
NetQ2_1: Q2.1 R7.2 | length 2.4
  Top Layer w0.254: R7.2 54.839,26.111 56.225,24.724 Q2.1
NetQ2_3: Q2.3 R5.2 R6.2 | length 11.6
  Top Layer w0.254: R6.2 55.702,29.87 55.702,26.695 58.623,23.774 Q2.3 59.131,23.774 60.593,22.312 R5.2
NetQ3_4: Q3.4 R10.1 | length 5.5
  Top Layer w0.254: R10.1 58.177,15.178 59.258,14.097 Q3.4
NetQ4_1: Q4.1 R11.2 | length 2.4
  Top Layer w0.254: R11.2 54.534,14.046 55.921,12.659 Q4.1
NetQ4_3: Q4.3 R9.2 R10.2 | length 10.9
  Top Layer w0.254: R10.2 56.363,17.424 56.363,15.748 57.861,14.249 57.861,11.709 Q4.3 58.841,11.709 60.314,10.236 R9.2
P-: J1.8 J1.9 J1.10 Q1.5-6-7-8 | length 8.8
  Top Layer w0.254: Q1.5-6-7-8 63.581,27.5 J1.10 J1.9 J1.8
PWR_N_EN: MD1.33 R4.1 R7.1 | length 61.5
  Top Layer w0.254: MD1.33 7.466,26.975 5.791,28.65 5.791,29.896 8.458,32.563 47.447,32.563 52.846,27.164 R7.1 52.846,23.749 52.796,23.698 R4.1
RST: MD1.3 P1.6 R1.2 | length 35.1
  Top Layer w0.254: v1(1.905,18.466) 3.656,16.715 MD1.3 3.656,1.04 3.073,0.457 1.346,0.457 1.295,0.508 1.295,3.237 R1.2
  Bottom Layer w0.254: v1(1.905,18.466) P1.6
RXD0: MD1.34 P1.3 | length 7.4
  Top Layer w0.254: v1(5.283,27.432) 6.196,26.519 MD1.34
  Bottom Layer w0.254: v1(5.283,27.432) 7.772,27.432 P1.3
TXD0: MD1.35 P1.4 | length 9.8
  Top Layer w0.254: v1(3.175,27.913) 4.926,26.162 MD1.35
  Bottom Layer w0.254: v1(3.175,27.913) 3.175,30.035 3.505,30.366 5.804,30.366 P1.4
UI-: J1.7 Q3.5-6-7-8 | length 29.6
  Top Layer w0.254: Q3.5-6-7-8 62.864,12.039 61.214,10.389 61.214,6.782 62.941,5.055 66.497,5.055 67.335,5.893 67.335,17.746 J1.7
UI_N_EN: MD1.30 R8.1 R11.1 | length 61.2
  Top Layer w0.254: MD1.30 11.276,13.006 v1(13.919,10.363) ; v1(52.426,12.878) v1@52.542,12.994 ; R11.1 v1@52.542,12.994 ; R8.1 52.77,11.278 52.542,11.506 v1@52.542,12.994
  Bottom Layer w0.254: v1(13.919,10.363) 16.434,12.878 v1(52.426,12.878)
VCC: C1.2 C3.1 J1.1 J1.2 J1.3 J1.4 J2.1 R2.2 R5.1 R9.1 R13.2 U1.7 | length 131.9
  Top Layer w0.254: v1(7.899,5.359) 7.899,3.084 R2.2 9.957,3.084 10.033,3.161 R13.2 ; U1.7 34.238,19.483 37.516,16.205 C1.2@37.516,6.86 ; C3.1 28.796,13.919 29.389,13.919 36.449,6.86 C1.2 C1.2@37.516,6.86 ; J2.1 43.537,6.86 C1.2@37.516,6.86 ; R9.1 64.211,8.738 64.222,8.748 J1.2 ; R5.1 62.393,19.395 64.694,17.094 64.694,14.387 J1.4 J1.3 J1.2 ; J1.1 J1.2
  Bottom Layer w0.254: v1(7.899,5.359) 11.887,1.372 38.049,1.372 J2.1 62.704,9.119 J1.4
pads on no net: MD1.4 MD1.5 MD1.6 MD1.8 MD1.10 MD1.12 MD1.13 MD1.14 MD1.16 MD1.17 MD1.18 MD1.19 MD1.20 MD1.21 MD1.22 MD1.23 MD1.24 MD1.26 MD1.28 MD1.29 MD1.31 MD1.32 MD1.36 MD1.37 U1.1 U1.2 U1.3

## Silkscreen, mask and mechanical layers (free items; w line width, h text height)
Mechanical 1:
  the board outline again, w0.254

## Text inside footprints (layer, text, board x,y; h text height)
P1: Top Overlay "6" at 2.285,27.485 h1.02 r180; Top Overlay "1" at 14.725,27.485 h1.02 r180